# Altium PCB VSC_PCB.PcbDoc (part 2 of 2)
Units mil, origin at the board's own origin, x right, y up, seen from the top; angles counter-clockwise.
Board outline 9964.56 x 7010.83 mil, 4 copper layers (Top Layer, Regulator Voltage, Regulator GND, Bottom Layer), stack 23.756 mil thick; 128 components, 80 nets, 378 pads, 666 vias.
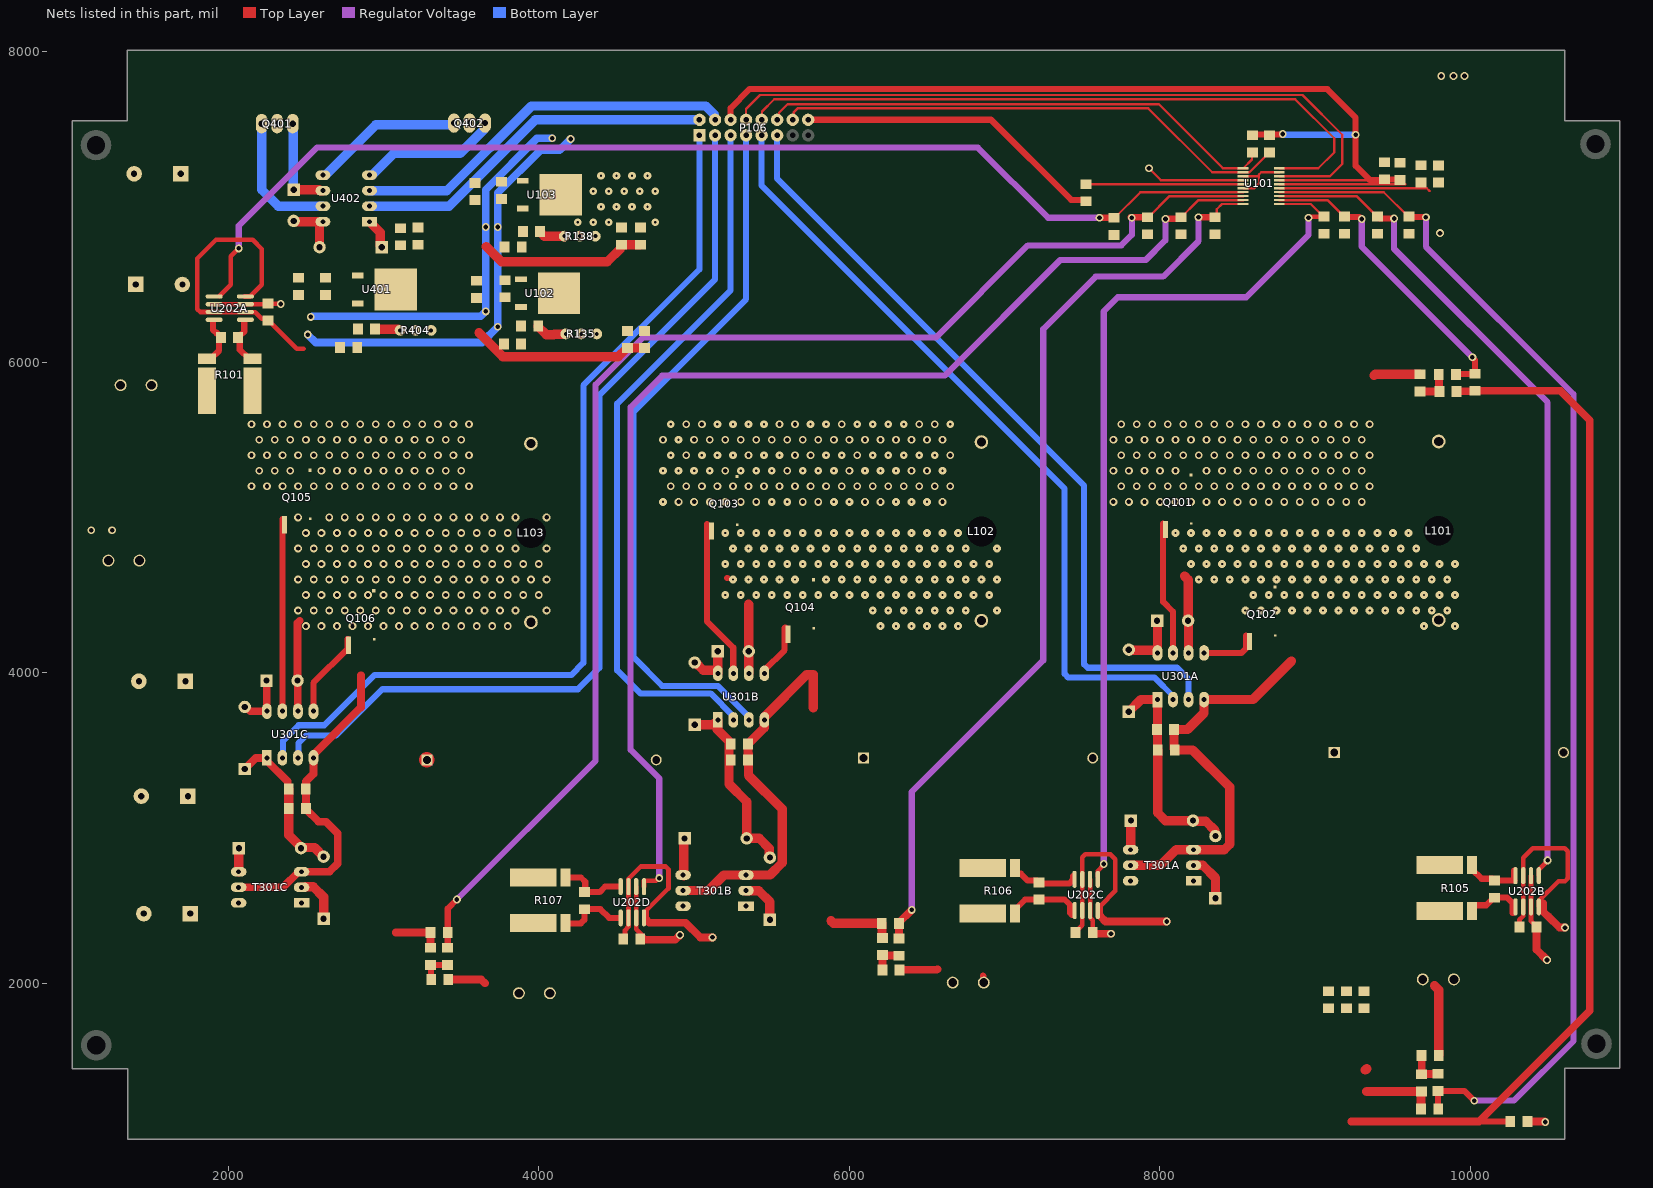
[diagram p4: the nets of this part, all layers, seen from the top]

## Via types
v1: diameter 50, hole 28, Top Layer to Bottom Layer, 361 vias
v2: diameter 50, hole 15, Top Layer to Bottom Layer, 264 vias
v3: diameter 50, hole 30, Top Layer to Bottom Layer, 41 vias

## Nets (pads, with @x,y where several pads share a name; then routed paths per layer and width w, separated by ;. In a path a pad name is that pad's centre, name@x,y a point inside that pad or via, vN(x,y) a via of type N, cw(c..) or ccw(c..) an arc to the next point about the centre after c; other vN are vias at no path point)
+3V3: C118.2 C119.2 P106.6 R131.2 R132.2 U101.16 U101.17 | length 6931.4
  Top Layer w15: U101.16@8767.72,7145.67 C119.2@9578.74,7145.67 ; U101.17@8767.72,7171.26 9350.39,7171.26
  Top Layer w40: P106.6@5234.65,7560.63 5234.65,7636.22 5356.4,7757.97 9076.67,7757.97 9259.84,7574.8 v3(9259.84,7464.57) 9259.84,7263.78 9350.39,7173.23 9444.88,7173.23 C118.2@9446.85,7175.2 ; R131.2@8594.49,7460.63 8600.45,7466.59 8789.43,7466.59 v3(8791.34,7468.5) ; C118.2@9444.88,7177.17 C118.2@9446.85,7175.2 ; C119.2@9547.24,7173.23 9545.28,7175.2 C118.2@9446.85,7175.2
  Bottom Layer w40: v3(8791.34,7468.5) 8795.28,7464.57 v3(9259.84,7464.57)
+10: C127.2 C128.2 C201A.2 C201B.2 C201C.2 C201D.2 R138.2 R138.W U103.2 U202A.3 U202A.6 U202B.3 U202B.6 U202C.3 U202C.6 U202D.3 U202D.6 | length 2106.5
  Top Layer w30: U202A.6@1901.57,6372.83 1902.17,6373.43 2243.5,6373.43 2246.06,6375.98 2336.61,6375.98 v3(2338.58,6374.02) ; U202D.6@4628.27,2623.43 U202D.6@4627.05,2622.2 U202D.3@4627.05,2421.42 4628.27,2420.2 4628.27,2348.11 4692.91,2283.46 4692.91,2279.53 ; v3@4905.51,2307.09 4909.45,2307.09 v3(4909.45,2311.02) ; U202C.6@7550,2669.29 U202C.3@7550,2468.5 7551.22,2467.28 7551.22,2421.1 7566.93,2405.39 C201C.2@7566.93,2326.77 ; U202B.6@10389.76,2692.91 U202B.3@10389.76,2492.13 10389.76,2400.21 10407.34,2382.64 10408.7,2382.64 10425.2,2366.14 C201B.2@10425.2,2362.2
  Top Layer w50: 4692.91,2279.53 4877.95,2279.53 v3(4909.45,2311.02) ; C201C.2@7566.93,2326.77 7566.93,2325.39 7573.43,2318.9 v3(7685.04,2318.9) ; C201B.2@10425.2,2362.2 10425.2,2216.54 v3(10492.13,2149.61)
  other v2: 4250,6900 4350,6900 4450,6900 4750,6900 4400,7000 4500,7000 4600,7000 4700,7000 4350,7100 4450,7100 4550,7100 4650,7100 4750,7100 4400,7200 4500,7200 4600,7200 4700,7200
+10D: C403.2 C404.2 D401.A R404.2 R404.W U401.2 U402.1 | length 206.4
  Top Layer w60: U402.1@2909.45,6903.94 2926.45,6903.94 2927.45,6902.94 2927.45,6885.94 2978.19,6835.2 2978.19,6750.16 D401.A@2988.19,6740.16
+12: C116.2 C117.2 C123.2 C124.2 R135.2 R135.W U101.15 U102.2 | length 975.8
  Top Layer w15: U101.15@8767.72,7120.08 9718.5,7120.08 9736.22,7102.36
+48: C101.1 C102.1 C103.1 C121.2 C122.2 C125.2 C126.2 C401.2 C402.2 C406.1 P101.1 P101.2 Q401.2 R101.1 U102.1 U103.1 U401.1
GND: C101.2 C102.2 C103.2 C104.1 C108.1 C109.1 C110.1 C116.1 C117.1 C118.1 C119.1 C120.1 C121.1 C122.1 C123.1 C124.1 C125.1 C126.1 C127.1 C128.1 C201A.1 C201B.1 C201C.1 C201D.1 C301A.1 C301B.1 C301C.1 C302A.1 C302B.1 C302C.1 C401.1 C402.1 C403.1 C404.1 C407.2 P102.1 P102.2 P106.16 Q102.2 Q104.2 Q106.2 Q402.3 R104.1 R109.2 R113.1 R116.1 R119.1 R123.1 R124.1 R125.1 R126.1 R127.1 R128.1 R129.1 R130.1 R133.1 R136.1 R139.2 R140.2 R141.2 R402.1 T301A.3 T301A.5 T301B.3 T301B.5 T301C.3 T301C.5 U101.3 U101.4 U101.6 U101.19 U202A.2 U202A.4 U202A.7 U202B.2 U202B.4 U202B.7 U202C.2 U202C.4 U202C.7 U202D.2 U202D.4 U202D.7 U301A.4 U301B.4 U301C.4 U402.4 | length 33367
  Top Layer w15: v3(7929.13,7248.03) 8005.91,7171.26 U101.4@8535.72,7171.26 ; U101.6@8535.72,7120.08 8608.27,7120.08 8637.8,7149.61 8637.8,7208.66 8638.78,7209.65 ; U101.3@8535.72,7196.85 8625.98,7196.85 8638.78,7209.65 ; U101.19@8767.72,7222.44 8651.57,7222.44 8638.78,7209.65
  Top Layer w30: U202A.2@2094.49,6322.83 1818.61,6322.83 1801.04,6340.41 1801.04,6667.18 1921.26,6787.4 2157.48,6787.4 2216.54,6728.35 2216.54,6498.11 2141.26,6422.83 U202A.4@2102.36,6422.83 ; U202A.2@2102.36,6322.83 2103.58,6321.61 2174.45,6321.61 2215.79,6280.28 2235.47,6280.28 C201A.1@2255.91,6267.72 2259.84,6267.72 2440.94,6086.61 2484.25,6086.61 ; C201D.1@4543.31,2283.46 4555.24,2295.4 4555.24,2342.1 4577.05,2363.91 U202D.2@4577.05,2421.42 U202D.7@4577.05,2622.2 4577.05,2671.54 4657.48,2751.97 4817.07,2751.97 4834.65,2734.39 4834.65,2610.24 4692.91,2468.5 4692.91,2409.45 ; C201C.1@7456.69,2326.77 7456.69,2330.71 7500,2374.02 U202C.2@7500,2468.5 U202C.7@7500,2669.29 7500,2811.02 7519.69,2830.71 7681.1,2830.71 7712.6,2799.21 7712.6,2594.49 7618.11,2500 7618.11,2429.13 ; C201B.1@10314.96,2362.2 10314.96,2409.45 10338.54,2433.03 10338.54,2490.91 U202B.2@10339.76,2492.13 U202B.7@10339.76,2692.91 10339.76,2808.27 10401.57,2870.08 10606.3,2870.08 10625.98,2850.39 10625.98,2675.05 10608.41,2657.48 10566.22,2657.48 10439.76,2531.02 U202B.4@10439.76,2492.13
  Top Layer w40: P106.16@5734.65,7560.63 6911.81,7560.63 7428.19,7044.25 7514.8,7044.25 C120.1@7523.62,7035.43 ; 9992.13,1110.24 R141.2@10255.91,1110.24
  Top Layer w50: T301C.5@2066.93,2618.11 2352.93,2618.11 2452.93,2718.11 T301C.3@2471.93,2718.11 2651.18,2718.11 2704.72,2771.65 2704.72,2964.57 2629.23,3040.06 2581.99,3040.06 2500,3122.05 C302C.1@2500,3125.98 2500,3299.21 2548.82,3348.03 U301C.4@2548.82,3451.97 2548.82,3470.97 2854.33,3776.48 2854.33,3984.25 ; 3078.74,2326.77 C110.1@3303.15,2326.77 R119.1@3303.15,2228.35 ; 4692.91,2409.45 4712.6,2389.76 4944.88,2389.76 5039.37,2295.28 v3(5118.11,2295.28) ; 7618.11,2429.13 7649.61,2397.64 v3(8043.31,2397.64) ; 9232.28,1110.24 9992.13,1110.24 10055.12,1110.24 10767.72,1822.83 10767.72,5625.98 10578.74,5814.96 10037.99,5814.96 10035.43,5817.52 10035.43,5818.9 10031.5,5814.96 C104.1@10027.56,5814.96 10025.59,5812.99 9911.42,5812.99 R104.1@9909.45,5811.02 ; 10468.5,2515.75 10468.5,2460.63 10500,2429.13 10502.4,2429.13 10573.27,2358.27 v3(10608.31,2358.27)
  Top Layer w60: 3614.17,6188.98 3767.72,6035.43 4511.81,6035.43 4565.43,6089.06 4569.37,6089.06 C124.1@4570.87,6090.55 C124.1@4570.87,6090.55 4680.78,6090.63 C123.1@4680.86,6090.7 ; 3661.42,6744.09 3759.84,6645.67 4440.94,6645.67 4526.06,6730.79 4526.06,6754.41 4527.56,6755.91 C128.1@4531.5,6755.91 C127.1@4653.54,6755.91 ; T301B.5@4929.13,2596.85 5092.91,2596.85 5192.91,2696.85 5488.99,2696.85 5568,2775.86 5568,2842.14 5566.93,2843.21 5566.93,3122.05 5350.39,3338.58 5350.39,3433.13 5350.39,3437.07 5350.39,3476.38 ; 5346.46,3476.38 C301B.1@5346.46,3539.36 5346.46,3543.29 5347.95,3544.79 5351.89,3544.79 5452.37,3645.27 5452.37,3695.68 U301B.4@5452.76,3696.06 5452.76,3715.06 5725.88,3988.19 5767.72,3988.19 5767.72,3774.12 ; 5881.89,2401.57 5897.64,2385.83 C109.1@6208.66,2385.83 6210.16,2384.33 6210.16,2292.83 6211.65,2291.34 R116.1@6212.6,2291.34 ; T301A.5@7811.02,2759.84 8003.94,2759.84 8103.94,2859.84 T301A.3@8235.56,2859.84 ; C302A.1@8095.67,3502.58 C302A.1@8095.67,3504.08 ; T301A.3@8216.02,2859.84 8413.67,2859.84 8448.82,2894.99 8448.82,3263.78 8210.02,3502.58 8097.17,3502.58 C302A.1@8095.67,3504.08 ; 8846.46,4074.8 8598.59,3826.94 U301A.4@8283.94,3826.94 8283.94,3740.64 8177.17,3633.86 C301A.1@8090.55,3633.86 8090.55,3511.64 8095.67,3506.52 C302A.1@8095.67,3504.08 ; 9322.83,1440.94 9330.71,1448.82 ; 9330.71,1303.15 R113.1@9682.6,1303.15 ; C108.1@9681.1,1188.98 R113.1@9681.1,1301.65
  Bottom Layer w50: v3(2511.81,6177.17) 2562.99,6125.98 3633.86,6125.98 v3(3736.22,6228.35) v3(3736.22,6870.08) 3736.22,7090.55 4011.81,7366.14 4133.86,7366.14 v3(4204.72,7437.01) ; v3@2540.7,6295.28 3625.98,6295.28 v3(3657.48,6326.77) v3(3657.48,6870.08) 3657.48,7110.24 3988.19,7440.94 v3(4086.61,7440.94)
  Bottom Layer w60: U402.4@2909.45,7203.94 2926.45,7203.94 3065.81,7343.29 3492.07,7343.29 3650.67,7501.9 3650.67,7536.5 Q402.3@3653.54,7539.37
  other v3: 1118.11,4917.32 1251.97,4917.32 2531.5,6291.34 9803.15,6830.71 9811.02,7842.52 9889.76,7842.52 9960.63,7842.52
HIN1: P106.9 U301A.2 | length 5056.9
  Bottom Layer w39.37: P106.9@5434.65,7460.63 5434.65,7136.22 7385.83,5185.04 7385.83,3991.78 7408.89,3968.72 7965.14,3968.72 8083.94,3849.92 U301A.2@8083.94,3826.94
HIN2: P106.5 U301B.2 | length 4642.3
  Bottom Layer w39.37: P106.5@5234.65,7460.63 5234.65,6462.99 4503.94,5732.28 4503.94,4015.75 4653.54,3866.14 5105.66,3866.14 5252.76,3719.04 U301B.2@5252.76,3696.06
HIN3: P106.1 U301C.2 | length 5960.6
  Bottom Layer w39.37: U301C.2@2348.82,3451.97 2353.15,3456.3 2353.15,3561.81 2452.76,3661.42 2618.11,3661.42 2940.94,3984.25 4208.66,3984.25 4287.4,4062.99 4287.4,5850.39 5034.65,6597.64 P106.1@5034.65,7460.63
HINP: P106.2 U402.2 | length 2350.4
  Bottom Layer w60: U402.2@2909.45,7003.94 3421.26,7003.94 3977.95,7560.63 P106.2@5029.23,7560.63
HN: C405.1 Q401.3 Q402.2 T301A.1 T301B.1 T301C.1 U402.6 | length 619.1
  Top Layer w60: C405.1@2421.26,7109.45 2586.4,7109.45 2591.91,7103.94 U402.6@2609.45,7103.94
  Bottom Layer w60: Q401.3@2414.96,7535.43 2417.83,7532.56 2417.83,7112.88 C405.1@2421.26,7109.45
HO: Q401.1 U402.7 | length 862.8
  Bottom Layer w60: Q401.1@2214.96,7535.43 2216.54,7533.86 2216.54,7110.24 2322.83,7003.94 U402.7@2609.45,7003.94
HS+1: Q101.1 U301A.7 | length 860.3
  Top Layer w39.37: 8019.69,4960.63 8019.69,4456.69 8083.94,4392.44 U301A.7@8083.94,4126.94
HS+2: Q103.1 U301B.7 | length 1031.5
  Top Layer w39.37: 5082.68,4956.69 5082.68,4330.71 5251.97,4161.42 5251.97,3996.06 U301B.7@5252.76,3996.06
HS+3: Q105.1 U301C.7 | length 1237.8
  Top Layer w40: U301C.7@2348.82,3751.97 Q105.1@2348.82,4989.76
HS-1: C303A.2 L101.1 Q101.2 Q102.3 U301A.6 | length 506.1
  Top Layer w60: 8157.48,4622.05 8181.1,4598.43 C303A.2@8181.1,4334.65 8183.56,4332.19 8183.56,4127.32 U301A.6@8183.94,4126.94
  other v2: 9700,4300 9900,4300 8550,4400 8650,4400 8750,4400 8850,4400 8950,4400 9050,4400 9150,4400 9250,4400 9350,4400 9450,4400 9550,4400 9650,4400 9750,4400 9850,4400 8600,4500 8700,4500 8800,4500 8900,4500 9000,4500 9100,4500 9200,4500 9300,4500 9400,4500 9500,4500 9600,4500 9700,4500 9800,4500 9900,4500 8250,4600 8350,4600 8450,4600 8550,4600 8650,4600 8750,4600 8850,4600 8950,4600 9050,4600 9150,4600 9250,4600 9350,4600 9450,4600 9550,4600 9650,4600 9750,4600 9850,4600 8200,4700 8300,4700 8400,4700 8500,4700 8600,4700 8700,4700 8800,4700 8900,4700 9000,4700 9100,4700 9200,4700 9300,4700 9400,4700 9500,4700 9600,4700 9700,4700 9800,4700 9900,4700 8150,4800 8250,4800 8350,4800 8450,4800 8550,4800 8650,4800 8750,4800 8850,4800 8950,4800 9050,4800 9150,4800 9250,4800 9350,4800 9450,4800 9550,4800 9650,4800 8100,4900 8200,4900 8300,4900 8400,4900 8500,4900 8600,4900 8700,4900 8800,4900 8900,4900 9000,4900 9100,4900 9200,4900 9300,4900 9400,4900 9500,4900 9600,4900
HS-2: C303B.2 L102.1 Q103.2 Q104.3 U301B.6 | length 447.5
  Top Layer w39.37: 5212.99,4609.06 5214.17,4610.24
  Top Layer w60: 5350.39,4440.94 5351.97,4439.37 C303B.2@5351.97,4137.8 5352.37,4137.39 5352.37,3996.45 U301B.6@5352.76,3996.06
  other v2: 6200,4300 6300,4300 6400,4300 6500,4300 6600,4300 6700,4300 6150,4400 6250,4400 6350,4400 6450,4400 6550,4400 6650,4400 6750,4400 6950,4400 5200,4500 5300,4500 5400,4500 5500,4500 5600,4500 5700,4500 5800,4500 5900,4500 6000,4500 6100,4500 6200,4500 6300,4500 6400,4500 6500,4500 6600,4500 6700,4500 6800,4500 6900,4500 5250,4600 5350,4600 5450,4600 5550,4600 5650,4600 5850,4600 5950,4600 6050,4600 6150,4600 6250,4600 6350,4600 6450,4600 6550,4600 6650,4600 6750,4600 6850,4600 6950,4600 5200,4700 5300,4700 5400,4700 5500,4700 5600,4700 5700,4700 5800,4700 5900,4700 6000,4700 6100,4700 6200,4700 6300,4700 6400,4700 6500,4700 6600,4700 6700,4700 6800,4700 6900,4700 5250,4800 5350,4800 5450,4800 5550,4800 5650,4800 5750,4800 5850,4800 5950,4800 6050,4800 6150,4800 6250,4800 6350,4800 6450,4800 6550,4800 6650,4800 6750,4800 6950,4800 5200,4900 5300,4900 5400,4900 5500,4900 5600,4900 5700,4900 5800,4900 5900,4900 6000,4900 6100,4900 6200,4900 6300,4900 6400,4900 6500,4900 6600,4900 6700,4900
HS-3: C303C.2 L103.1 Q105.2 Q106.3 U301C.6 | length 589.5
  Top Layer w50: U301C.6@2448.82,3751.97 2447.64,3753.15 2447.64,3947.64 C303C.2@2446.46,3948.82 2446.46,4320.47 2460.63,4334.65
  other v1: 2500,4300 2600,4300 2700,4300 2800,4300 2900,4300 3000,4300 3100,4300 3200,4300 3300,4300 3400,4300 3500,4300 3600,4300 3700,4300 3800,4300 2450,4400 2550,4400 2650,4400 2750,4400 2850,4400 2950,4400 3050,4400 3150,4400 3250,4400 3350,4400 3450,4400 3550,4400 3650,4400 3750,4400 3850,4400 4050,4400 2500,4500 2600,4500 2700,4500 2800,4500 2900,4500 3000,4500 3100,4500 3200,4500 3300,4500 3400,4500 3500,4500 3600,4500 3700,4500 3800,4500 3900,4500 4000,4500 2450,4600 2550,4600 2650,4600 2750,4600 2850,4600 2950,4600 3050,4600 3150,4600 3250,4600 3350,4600 3450,4600 3550,4600 3650,4600 3750,4600 3850,4600 3950,4600 4050,4600 2500,4700 2600,4700 2700,4700 2800,4700 2900,4700 3000,4700 3100,4700 3200,4700 3300,4700 3400,4700 3500,4700 3600,4700 3700,4700 3800,4700 3900,4700 4000,4700 2450,4800 2550,4800 2650,4800 2750,4800 2850,4800 2950,4800 3050,4800 3150,4800 3250,4800 3350,4800 3450,4800 3550,4800 3650,4800 3750,4800 3850,4800 4050,4800 2500,4900 2600,4900 2700,4900 2800,4900 2900,4900 3000,4900 3100,4900 3200,4900 3300,4900 3400,4900 3500,4900 3600,4900 3700,4900 3800,4900 2450,5000 2650,5000 2750,5000 2850,5000 2950,5000 3050,5000 3150,5000 3250,5000 3350,5000 3450,5000 3550,5000 3650,5000 3750,5000 3850,5000 4050,5000
IS+1: C111.2 R101.2 U202A.8 | length 316.9
  Top Layer w40: R101.2@1863.48,6021.96 1888.48,6021.96 1941.26,6074.74 1941.26,6145.98 C111.2@1952.76,6157.48 1952.76,6161.42 1928.94,6185.23 1925.01,6185.23 1901.57,6208.66 U202A.8@1901.57,6263.78
IS+2: C112.2 R105.2 U202B.8 | length 372.2
  Top Layer w39.37: R105.2@10009.09,2760.06 10009.09,2735.06 10070.92,2673.23 10141.73,2673.23 C112.2@10153.54,2661.42 U202B.8@10283.86,2661.42 ; U202B.8@10279.53,2684.48 U202B.8@10279.53,2726.39
IS+3: C113.2 R106.2 U202C.8 | length 463.6
  Top Layer w39.37: R106.2@7066.51,2743.78 7066.51,2718.78 7079.83,2705.46 7104.83,2705.46 7148.87,2661.42 7208.66,2661.42 7227.78,2642.3 7416.65,2642.3 7439.72,2665.37 U202C.8@7439.72,2689.55
IS+4: C114.2 R107.2 U202D.8 | length 447.1
  Top Layer w39.37: R107.2@4171.57,2681.1 4271.65,2681.1 4299.21,2653.54 4299.21,2592.61 C114.2@4293.82,2587.21 4391.06,2587.21 4426.05,2622.2 U202D.8@4518.82,2622.2
IS-1: C111.1 R101.3 U202A.1 | length 314.2
  Top Layer w40: U202A.1@2102.36,6263.78 2102.36,6196.85 2078.43,6172.91 2074.49,6172.91 2062.99,6161.42 C111.1@2062.99,6157.48 2074.49,6145.98 2074.49,6079.95 2130.82,6023.62 2133.86,6023.62 2135.52,6021.96 R101.3@2157.48,6021.96
IS-2: C112.1 R105.3 U202B.1 | length 423.7
  Top Layer w39.37: R105.3@10009.09,2466.06 10009.09,2451.54 10011.81,2448.82 10011.81,2492.13 10022.4,2502.72 10101.14,2502.72 10149.61,2551.18 C112.1@10153.54,2551.18 10236.22,2551.18 10271.65,2515.75 10271.65,2452.76
IS-3: C113.1 R106.3 U202C.1 | length 489.1
  Top Layer w39.37: R106.3@7066.51,2449.78 7066.51,2474.78 7131.1,2539.37 C113.1@7220.47,2539.37 7385.83,2539.37 7421.26,2503.94 7421.26,2452.76 7433.07,2440.94
IS-4: C114.1 R107.3 U202D.1 | length 454.2
  Top Layer w39.37: R107.3@4167.63,2385.83 4270.76,2385.83 4293.82,2408.89 C114.1@4293.82,2476.98 4397.04,2476.98 4452.6,2421.42 U202D.1@4521.14,2421.42
ISO1: R130.2 U101.7 U202A.5 | length 7439.1
  Top Layer w15: R130.2@7704.72,6929.13 7708.66,6929.13 7874.02,7094.49 U101.7@8535.72,7094.49
  Top Layer w30: U202A.5@1941.69,6424.06 2015.86,6498.22 2015.86,6681.21 v3(2066.93,6732.28)
  Top Layer w40: v3(7610.24,6929.13) R130.2@7704.72,6929.13
  Regulator Voltage w40: v3(2066.93,6732.28) 2066.93,6877.54 2571.27,7381.89 6826.77,7381.89 7279.53,6929.13 v3(7610.24,6929.13)
ISO2: R127.2 U101.13 U202B.5 | length 5464.6
  Top Layer w15: U101.13@8767.72,7068.9 9265.75,7068.9 9397.64,6937.01 R127.2@9401.57,6937.01
  Top Layer w30: U202B.5@10439.76,2692.91 10439.76,2731.81 10496.06,2788.11 v3(10496.06,2791.34)
  Top Layer w40: R127.2@9401.57,6937.01 9413.07,6925.51 9440,6925.51 9440.32,6925.2 v3(9507.87,6925.2)
  Regulator Voltage w40: v3(9507.87,6925.2) 9507.87,6728.35 10496.06,5740.16 v3(10496.06,2791.34)
ISO3: R123.2 U101.11 U202C.5 | length 5713.5
  Top Layer w15: U101.11@8767.72,7017.72 8970.47,7017.72 9051.18,6937.01 R123.2@9055.12,6937.01
  Top Layer w30: U202C.5@7598.43,2685.04 7598.43,2722.93 7637.8,2762.3 v3(7637.8,2767.72) ; v3(8956.69,6929.13) 8962.1,6929.13 8969.98,6937.01 R123.2@9055.12,6937.01
  Regulator Voltage w40: v3(7637.8,2767.72) 7637.8,6326.77 7728.35,6417.32 8555.12,6417.32 8956.69,6818.9 v3(8956.69,6929.13)
ISO4: R126.2 U101.9 U202D.5 | length 7830.9
  Top Layer w15: R126.2@8123.96,6923.17 8127.9,6923.17 8248.03,7043.31 U101.9@8535.72,7043.31
  Top Layer w30: U202D.5@4677.05,2622.2 4677.05,2661.1 4754.12,2661.1 4770.18,2677.17 v3(4775.59,2677.17)
  Top Layer w40: v3(8035.43,6921.26) 8037.35,6923.17 R126.2@8123.96,6923.17
  Regulator Voltage w40: v3(4775.59,2677.17) 4775.59,3318.9 4590.55,3503.94 4590.55,5708.66 4795.28,5913.39 6614.17,5913.39 7358.27,6657.48 7909.45,6657.48 8035.43,6783.46 v3(8035.43,6921.26)
LIN1: P106.11 U301A.3 | length 5068.1
  Bottom Layer w39.37: P106.11@5534.65,7460.63 5534.65,7181.89 7511.81,5204.72 7511.81,4054.56 7534.87,4031.5 8110.24,4031.5 8183.94,3957.79 U301A.3@8183.94,3826.94
LIN2: P106.7 U301B.3 | length 4582.6
  Bottom Layer w39.37: P106.7@5334.65,7460.63 5334.65,6405.51 4610.24,5681.1 4610.24,4098.43 4793.15,3915.51 5152.31,3915.51 5352.76,3715.06 U301B.3@5352.76,3696.06
LIN3: P106.3 U301C.3 | length 5972.2
  Bottom Layer w39.37: U301C.3@2448.82,3451.97 2453.15,3456.3 2453.15,3547.64 2500,3594.49 2692.91,3594.49 2992.13,3893.7 4251.97,3893.7 4389.76,4031.5 4389.76,5787.4 5134.65,6532.28 P106.3@5134.65,7460.63
LINP: P106.4 U402.3 | length 2505.1
  Bottom Layer w60: U402.3@2909.45,7103.94 3407.09,7103.94 3952.76,7649.61 5074.8,7649.61 5130.82,7593.59 5130.82,7564.46 P106.4@5134.65,7560.63
LO: Q402.1 U402.5 | length 985.9
  Bottom Layer w60: U402.5@2609.45,7203.94 2626.45,7203.94 2950.07,7527.56 3446.61,7527.56 3453.54,7534.49 Q402.1@3453.54,7539.37
LS+1: Q102.1 U301A.5 | length 382.6
  Top Layer w39.37: U301A.5@8279.53,4137.8 8291.34,4125.98 8523.62,4125.98 8555.12,4157.48 8555.12,4240.16 ; U301A.5@8283.94,4126.94 U301A.5@8283.94,4133.38
LS+2: Q104.1 U301B.5 | length 350.7
  Top Layer w39.37: U301B.5@5452.76,3996.06 5452.76,4015.06 5582.68,4144.98 5582.68,4287.4 5586.61,4291.34
LS+3: Q106.1 U301C.5 | length 556.1
  Top Layer w39.37: U301C.5@2548.82,3751.97 2548.82,3934.65 2769.69,4155.51 Q106.1@2769.69,4216.54
NetC105_1: C105.1 C106.1 C107.1 R109.1 R139.1 R140.1 | length 0.2
  Top Layer w100: C107.1@3279.53,3438.35 C107.1@3279.68,3438.5
NetC105_2: C105.2 L101.2 R105.1
NetC106_2: C106.2 L102.2 R106.1
NetC107_2: C107.2 L103.2 R107.1
NetC120_2: C120.2 U101.5 | length 1012.1
  Top Layer w15: C120.2@7523.62,7145.67 U101.5@8535.72,7145.67
NetC301A_2: C301A.2 C302A.2 D301A.A D302A.K D303A.K U301A.1 | length 1362
  Top Layer w60: D301A.A@7799.21,3748.03 7878.12,3826.94 U301A.1@7983.94,3826.94 C301A.2@7983.94,3634.49 ; C301A.2@7981.81,3634.49 7981.81,3628.43 7983.94,3626.29 7983.94,3578.74 C302A.2@7983.94,3504.07 ; C302A.2@7985.44,3502.58 7985.44,3097.24 8035.43,3047.24 D302A.K@8212.6,3047.24 8216.43,3043.42 8294.58,3043.42 D303A.K@8354,2984
NetC301B_2: C301B.2 C302B.2 D301B.A D302B.K D303B.K U301B.1 | length 1227.9
  Top Layer w60: D301B.A@5003.94,3665.35 5122.05,3665.35 5132.76,3676.06 U301B.1@5151.76,3676.06 ; U301B.1@5152.76,3696.06 5151.76,3695.06 U301B.1@5151.76,3676.06 ; D303B.K@5488,2809 5484.17,2812.83 5484.17,2867.83 5418.93,2933.07 D302B.K@5338.58,2933.07 5338.58,3169.29 5224.41,3283.46 5224.41,3559.06 5149.61,3633.86 5151.76,3636.01 U301B.1@5151.76,3676.06
NetC301C_2: C301C.2 C302C.2 D301C.A D302C.K D303C.K U301C.1 | length 1016
  Top Layer w50: D301C.A@2106.3,3379.53 2177.57,3450.8 2247.65,3450.8 U301C.1@2248.82,3451.97 2248.82,3432.97 2382.63,3299.16 2382.63,3258.46 C301C.2@2389.13,3251.97
  Top Layer w60: C301C.2@2389.13,3251.97 2389.13,3047.88 2389.76,3047.24 2389.76,2954.23 2470.09,2873.91 D302C.K@2472.33,2873.91 ; D302C.K@2468.5,2870.08 D302C.K@2472.33,2873.91 ; D303C.K@2614,2815 2555.09,2873.91 D302C.K@2472.33,2873.91
NetC303A_1: C303A.1 D301A.K U301A.8 | length 411.9
  Top Layer w39.37: D301A.K@7799.21,4148.03 D301A.K@7800.79,4148.03
  Top Layer w60: D301A.K@7800.79,4148.03 7804.61,4144.2 7983.02,4144.2 7983.94,4143.28 U301A.8@7983.94,4126.94 7983.56,4127.32 7983.56,4332.19 C303A.1@7981.1,4334.65
NetC303B_1: C303B.1 D301B.K U301B.8 | length 330.4
  Top Layer w60: D301B.K@5003.94,4065.35 5009.35,4065.35 5059.26,4015.45 5151.83,4015.45 5152.76,4014.52 U301B.8@5152.76,3996.06 5152.37,3996.45 5152.37,4137.39 C303B.1@5151.97,4137.8
NetC303C_1: C303C.1 D301C.K U301C.8 | length 351.8
  Top Layer w50: D301C.K@2106.3,3779.53 2114.42,3779.53 2141.98,3751.97 U301C.8@2248.82,3751.97 2247.64,3753.15 2247.64,3947.64 C303C.1@2246.46,3948.82
NetC405_2: C405.2 D401.K U402.8 | length 372.7
  Top Layer w60: C405.2@2421.26,6909.45 2426.67,6909.45 2432.18,6903.94 U402.8@2609.45,6903.94 2592.99,6903.94 2588.19,6899.14 D401.K@2588.19,6740.16
NetC406_2: C406.2 C407.1 T301A.6 T301B.6 T301C.6
NetD302A_A: D302A.A T301A.4 | length 188.1
  Top Layer w60: T301A.4@7811.02,2859.84 7811.81,2860.63 7811.81,3046.46 D302A.A@7812.6,3047.24
NetD302B_A: D302B.A T301B.4 | length 248
  Top Layer w39.37: T301B.4@4929.13,2696.85 T301B.4@4933.07,2692.91
  Top Layer w60: T301B.4@4933.07,2692.91 4933.07,2927.56 D302B.A@4938.58,2933.07
NetD302C_A: D302C.A T301C.4 | length 152.6
  Top Layer w60: T301C.4@2066.93,2718.11 2067.72,2718.9 2067.72,2869.29 D302C.A@2068.5,2870.08
NetD303A_A: D303A.A T301A.2 | length 315.1
  Top Layer w60: T301A.2@8216.02,2759.84 8216.41,2759.46 8275.97,2759.46 8357,2678.43 D303A.A@8357,2538
NetD303B_A: D303B.A T301B.2 | length 299.9
  Top Layer w60: T301B.2@5334.13,2596.85 5334.52,2596.47 5416.92,2596.47 5488,2525.39 D303B.A@5488,2409
NetD303C_A: D303C.A T301C.2 | length 311.6
  Top Layer w60: T301C.2@2471.93,2618.11 2491.47,2618.11 2495.41,2622.05 2547.24,2622.05 2614,2555.29 D303C.A@2614,2415
NetP103_1: P103.1 P103.2 R105.4 R112.2 | length 460.2
  Top Layer w60: 9767.72,1984.25 9795.28,1956.69 R112.2@9795.28,1535.43
NetP104_1: P104.1 P104.2 R106.4 R115.2 | length 248.6
  Top Layer w39.37: 6860.2,2049.24 6862.2,2047.24
  Top Layer w50: R115.2@6322.83,2086.61 6562.99,2086.61 6566.93,2090.55
NetP105_1: P105.1 P105.2 R107.4 R118.2 | length 246
  Top Layer w50: R118.2@3417.32,2023.62 3629.92,2023.62 3653.54,2000
NetQ101_3: Q101.3 Q103.3 Q105.3 R101.4 R102.2 | length 298.5
  Top Layer w60: 9377.95,5913.39 9385.83,5921.26 R102.2@9673.23,5921.26
  other v1: 4900,5100 5000,5100 5300,5100 5400,5100 5700,5100 5800,5100 6100,5100 6200,5100 6600,5100 7700,5100 7800,5100 7900,5100 8000,5100 8100,5100 8200,5100 8300,5100 8400,5100 8500,5100 8600,5100 8700,5100 8800,5100 8900,5100 9000,5100 9100,5100 9200,5100 9300,5100 2150,5200 2250,5200 2350,5200 2450,5200 2550,5200 2650,5200 2750,5200 2850,5200 2950,5200 3050,5200 3150,5200 3250,5200 3350,5200 3450,5200 3550,5200 4850,5200 4950,5200 5050,5200 5150,5200 5250,5200 5350,5200 5450,5200 5550,5200 5650,5200 5750,5200 5850,5200 5950,5200 6050,5200 6150,5200 6250,5200 6350,5200 6450,5200 6550,5200 6650,5200 7750,5200 7850,5200 7950,5200 8050,5200 8150,5200 8250,5200 8350,5200 8450,5200 8550,5200 8650,5200 8750,5200 8850,5200 8950,5200 9050,5200 9150,5200 9250,5200 9350,5200 2200,5300 2300,5300 2400,5300 2600,5300 2700,5300 2800,5300 2900,5300 3000,5300 3100,5300 3200,5300 3300,5300 3400,5300 3500,5300 5200,5300 5600,5300 6000,5300 6400,5300 6500,5300 7700,5300 7800,5300 7900,5300 8000,5300 8100,5300 8300,5300 8400,5300 8500,5300 8600,5300 8700,5300 8800,5300 8900,5300 9000,5300 9100,5300 9200,5300 9300,5300 2150,5400 2250,5400 2350,5400 2450,5400 2550,5400 2650,5400 2750,5400 2850,5400 2950,5400 3050,5400 3150,5400 3250,5400 3350,5400 3450,5400 3550,5400 4950,5400 5350,5400 5650,5400 5750,5400 6050,5400 6650,5400 7750,5400 7850,5400 7950,5400 8050,5400 8150,5400 8250,5400 8350,5400 8450,5400 8550,5400 8650,5400 8750,5400 8850,5400 8950,5400 9050,5400 9150,5400 9250,5400 9350,5400 2200,5500 2300,5500 2400,5500 2500,5500 2600,5500 2700,5500 2800,5500 2900,5500 3000,5500 3100,5500 3200,5500 3300,5500 3400,5500 3500,5500 4800,5500 5000,5500 5100,5500 5200,5500 5300,5500 5400,5500 5500,5500 5600,5500 5700,5500 5800,5500 5900,5500 6000,5500 6100,5500 6200,5500 6300,5500 6400,5500 6500,5500 6600,5500 7700,5500 7800,5500 7900,5500 8000,5500 8100,5500 8200,5500 8300,5500 8400,5500 8500,5500 8600,5500 8700,5500 8800,5500 8900,5500 9000,5500 9100,5500 9200,5500 9300,5500 2150,5600 2250,5600 2350,5600 2450,5600 2550,5600 2650,5600 2750,5600 2850,5600 2950,5600 3050,5600 3150,5600 3250,5600 3350,5600 3450,5600 3550,5600 4950,5600 5050,5600 5550,5600 5650,5600 5950,5600 6450,5600 6550,5600 7750,5600 7850,5600 7950,5600 8050,5600 8150,5600 8250,5600 8350,5600 8450,5600 8550,5600 8650,5600 8750,5600 8850,5600 8950,5600 9050,5600 9150,5600 9250,5600 9350,5600
  other v2: 4800,5100 5100,5100 5200,5100 5500,5100 5600,5100 5900,5100 6000,5100 6300,5100 6400,5100 6500,5100 4800,5300 4900,5300 5000,5300 5100,5300 5300,5300 5400,5300 5500,5300 5700,5300 5800,5300 5900,5300 6100,5300 6200,5300 6300,5300 6600,5300 4850,5400 5050,5400 5150,5400 5250,5400 5450,5400 5550,5400 5850,5400 5950,5400 6150,5400 6250,5400 6350,5400 6450,5400 6550,5400 4900,5500 4850,5600 5150,5600 5250,5600 5350,5600 5450,5600 5750,5600 5850,5600 6050,5600 6150,5600 6250,5600 6350,5600 6650,5600
NetR102_1: R102.1 R103.2 R104.2 | length 237.9
  Top Layer w50: R102.1@9673.23,5811.02 R104.2@9799.21,5811.02 9797.24,5812.99 9797.24,5919.29 R103.2@9795.28,5921.26
NetR112_1: R112.1 R113.2 R114.2 | length 230
  Top Layer w50: R112.1@9685.04,1535.43 R113.2@9685.04,1413.39 9687.01,1415.35 9789.37,1415.35 R114.2@9791.34,1417.32
NetR115_1: R115.1 R116.2 R117.2 | length 202.4
  Top Layer w50: R115.1@6212.6,2086.61 R116.2@6212.6,2181.1 6214.57,2179.13 6316.93,2179.13 R117.2@6318.9,2177.17
NetR118_1: R118.1 R119.2 R120.2 | length 206.4
  Top Layer w39.37: R118.1@3307.09,2023.62 3305.12,2025.59 3305.12,2116.14 R119.2@3303.15,2118.11 R120.2@3413.39,2118.11
NetR133_2: R133.2 R134.2 U102.3
NetR134_1: R134.1 R135.1 | length 203.9
  Top Layer w60: R134.1@3996.06,6232.28 3996.06,6228.35 4047.24,6177.17 4096.95,6177.17 4098.97,6179.19 4171.31,6179.19 R135.1@4173.23,6181.1
NetR136_2: R136.2 R137.2 U103.3
NetR137_1: R137.1 R138.1 | length 176.8
  Top Layer w60: R137.1@4007.87,6842.52 4007.87,6838.58 4035.43,6811.02 4161.42,6811.02 R138.1@4165.35,6807.09 ; R138.1@4163.78,6808.66 R138.1@4163.78,6811.02
NetR402_2: R402.2 R403.2 U401.3
NetR403_1: R403.1 R404.1 | length 164.7
  Top Layer w60: R403.1@2944.88,6212.6 3095.72,6212.6 3103.59,6204.72 R404.1@3106.3,6204.72
Shield: R141.1 | length 115.8
  Top Layer w50: R141.1@10366.14,1110.24 10476.38,1110.24 v3(10480.32,1106.3)
SPI2(ADC)-MISO: P106.8 U101.18 | length 4678.5
  Top Layer w15: P106.8@5334.65,7560.63 5334.65,7629.92 5425.2,7720.47 8917.32,7720.47 9173.23,7464.57 9173.23,7275.59 9094.49,7196.85 U101.18@8767.72,7196.85
SPI2(ADC)-MOSI: P106.14 R132.1 U101.2 | length 3351.1
  Top Layer w15: P106.14@5634.65,7560.63 5642.58,7568.56 5642.58,7611.08 5665.35,7633.86 7924.61,7633.86 8336.03,7222.44 8576.87,7222.44 8676.79,7322.36 8676.79,7326.4 8700.79,7350.39 R132.1@8704.72,7350.39
SPI2(ADC)-NCS: P106.12 R131.1 U101.1@8535.72,7248.03 | length 3387.1
  Top Layer w15: P106.12@5534.65,7560.63 5547.08,7573.07 5547.08,7606.14 5602.36,7661.42 7991.54,7661.42 8404.93,7248.03 U101.1@8535.72,7248.03 ; U101.1@8562.72,7248.03 U101.1@8535.72,7248.03 ; R131.1@8594.49,7350.39 8592.87,7348.77 8592.87,7305.18 U101.1@8535.72,7248.03
SPI2(ADC)-SCK: P106.10 U101.20 | length 4363.8
  Top Layer w15: P106.10@5434.65,7560.63 5437.18,7563.16 5437.18,7614.34 5515.75,7692.91 8870.08,7692.91 9122.05,7440.94 9122.05,7350.39 9019.68,7248.03 U101.20@8767.72,7248.03
VS+1: C104.2 R103.1 R124.2 U101.12 | length 2003.5
  Top Layer w15: U101.12@8767.72,7043.31 9078.74,7043.31 9187.92,6934.13 R124.2@9191.85,6934.13
  Top Layer w39.37: R124.2@9191.85,6934.13 9283.46,6934.13 9296.34,6921.26 v3(9299.21,6921.26) ; R103.1@9905.51,5921.26 9907.48,5923.23 10025.59,5923.23 C104.2@10027.56,5925.2 10027.56,6012.87 10011.81,6028.62 v3(10011.81,6031.5)
  Regulator Voltage w39.37: v3(9299.21,6921.26) 9299.21,6744.09 v3(10011.81,6031.5)
VS+2: C108.2 R114.1 R128.2 U101.14 | length 7885.6
  Top Layer w15: U101.14@8767.72,7094.49 9440.94,7094.49 9598.43,6937.01 R128.2@9602.36,6937.01
  Top Layer w39.37: R128.2@9602.36,6937.01 9604.33,6935.04 9710.63,6935.04 v3(9712.6,6933.07) ; C108.2@9791.34,1188.98 R114.1@9791.34,1307.09 9960.63,1307.09 v3(10023.62,1244.09)
  Regulator Voltage w39.37: v3(9712.6,6933.07) 9712.6,6744.09 10663,5793.69 10663,1627.57 10279.53,1244.09 v3(10023.62,1244.09)
VS+3: C109.2 R117.1 R125.2 U101.10 | length 6038.7
  Top Layer w15: R125.2@8354.33,6933.07 8366.14,6944.88 8366.14,6984.25 8399.61,7017.72 U101.10@8535.72,7017.72
  Top Layer w40: v3(8248.03,6933.07) R125.2@8354.33,6933.07
  Top Layer w50: R117.1@6318.9,2287.4 C109.2@6318.9,2385.83 6318.9,2389.76 v3@6397.64,2468.5
  Regulator Voltage w40: v3(6401.57,2472.44) 6401.57,3232.28 7248.03,4078.74 7248.03,6212.6 7586.61,6551.18 8019.69,6551.18 8248.03,6779.53 v3(8248.03,6933.07)
VS+4: C110.2 R120.1 R129.2 U101.8 | length 8773.6
  Top Layer w15: R129.2@7921.26,6933.07 7925.2,6933.07 8061.02,7068.9 U101.8@8535.72,7068.9
  Top Layer w39.37: R120.1@3413.39,2228.35 C110.2@3413.39,2326.77 3413.39,2480.32 v3(3472.44,2539.37) ; v3(7818.9,6929.13) 7814.96,6929.13 7811.02,6933.07 R129.2@7921.26,6933.07
  Regulator Voltage w39.37: v3(3472.44,2539.37) 4366.14,3433.07 4366.14,5854.33 4669.29,6157.48 6555.12,6157.48 7149.61,6751.97 7751.97,6751.97 7818.9,6818.9 v3(7818.9,6929.13)
pads on no net: L101.3 L102.3 L103.3 P106.13 P106.15 U101.1@8510.72,7282.87

## Polygon pours and split planes (outlines as drawn)
HS-1 on Top Layer "HS-1_L01_P104" (solid, pour order 104): 8066.93,5011.81 8066.93,4515.75 8078.74,4515.75 8078.74,4507.87 8192.91,4507.87 8496.06,4507.87 8496.06,4322.83 9633.86,4322.83 9633.86,4224.41 9964.57,4224.41 9964.57,4704.72 9964.57,5011.81
HS-2 on Top Layer "HS-2_L01_P099" (solid, pour order 99): 5141.73,4374.02 5283.46,4374.02 6086.61,4374.02 6086.61,4169.29 6992.13,4169.29 6992.13,4208.66 6992.13,4236.22 6992.13,4456.69 6992.13,5003.94 5141.73,5003.94
HS-3 on Top Layer "HS-3_L01_P083" (solid, pour order 83): 2386.71,5066.93 2388.35,4263.78 4137.8,4263.78 4137.8,5066.93
GND on Top Layer "GND_L01_P084" (solid, pour order 84): 1586.61,4724.41 1586.61,2177.17 2797.87,2177.17 2797.87,3988.19 2800.55,4231.69 3121.43,4231.69 3121.43,1748.03 5629.92,1748.03 5629.92,4307.09 5958.4,4307.09 5946.18,1748.03 8602.41,1748.03 8602.41,4259.84 8952.76,4259.84 8952.76,1724.41 9028.97,1724.41 9028.97,1874.02 9381.89,1874.02 9381.89,1059.06 1460.63,1059.06 1460.63,1503.94 1271.65,1503.94 1271.65,1724.41 1062.99,1724.41 1062.99,4724.41
GND on Top Layer "NONET_L-01_P-001" (solid, pour order 117): 1065.93,4732.28 1341.46,4732.28 1341.46,5223.42 1219.41,5223.42 1219.41,7066.93 1426.39,7066.93 1426.39,7244.25 1859.59,7735.24 3621.83,7735.24 3621.83,7479.32 3695.79,7479.32 3870.61,7479.31 3870.61,7358.48 4543.84,7358.48 4543.84,7793.57 9949.35,7793.57 9949.35,7314.96 9401.57,7314.96 9401.57,7232.28 10133.86,7232.28 10133.86,7951.76 1471.38,7951.76 1471.38,7546.25 1065.93,7140.8 1065.93,6806.09
+48 on Top Layer "NONET_L-01_P-001" (solid, pour order 116): 1247.25,5275.59 1633.86,5275.59 1633.86,2307.09 1929.13,2307.09 1929.13,5960.63 1674.4,5960.63 1674.4,6122.05 1457.92,6122.05 1457.92,6824.13 2264.38,6824.13 2264.38,6511.81 2870.08,6511.81 2870.08,6582.08 2334.65,6582.08 2334.65,6894.39 1603.53,6894.39 1603.53,7240.16 1662.59,7318.9 3391.88,7318.9 3391.88,6488.19 3929.13,6488.19 3929.13,6582.08 3531.5,6582.08 3531.5,7122.05 3940.94,7122.05 3940.94,7196.85 3814.96,7196.85 3814.96,7460.63 2354.33,7460.63 2354.33,7599.35 2275.59,7599.35 2275.59,7460.63 1662.59,7460.63 1457.92,7240.16 1457.92,6952.76 1247.25,6952.76
GND on Top Layer "NONET_L-01_P-001" (solid, pour order 137): 9826.77,6866.14 8706.56,6866.14 8713.85,7204.72 8597.3,7204.72 8597.3,6866.14 7566.93,6866.14 7566.93,7082.68 7472.44,7082.68 7472.44,6771.65 9826.77,6771.65
GND on Top Layer "NONET_L-01_P-001" (solid, pour order 120): 2405.51,6464.57 2759.84,6464.57 2759.84,6055.12 2405.51,6055.12
GND on Top Layer "NONET_L-01_P-001" (solid, pour order 128): 3551.18,6452.76 3551.18,6059.06 3814.96,6059.06 3814.96,6452.76 3771.65,6452.76
NetC105_1 on Top Layer "NONET_L-01_P-001" (solid, pour order 132): 9381.89,1913.39 9381.89,3625.98 9007.87,3625.98 9007.87,1913.39
NetC105_2 on Top Layer "NETC105_2_L01_P112" (solid, pour order 112): 9661.42,5641.73 9661.42,5125.98 10066.93,5125.98 10066.93,3683.49 9618.11,3683.49 9618.11,2692.91 9951.41,2692.91 9945.6,3271.57 10530.06,3271.57 10694.94,3271.57 10694.94,3619.9 10500,3624.07 10500,5641.73
+12 on Top Layer "NONET_L-01_P-001" (solid, pour order 129): 10133.86,7188.98 9645.67,7188.98 9645.67,7098.43 9850.92,7098.43 9850.92,6271.65 4755.91,6271.65 4755.91,6598.43 3992.13,6598.43 3992.13,6299.21 4220.47,6299.21 4220.47,6102.36 4224.41,6106.3 4476.38,6106.3 4476.38,6149.61 10133.86,6149.61
NetR133_2 on Top Layer "NONET_L-01_P-001" (solid, pour order 127): 3933.07,6381.89 3933.07,6078.74 3834.65,6078.74 3834.65,6381.89
GND on Top Layer "NONET_L-01_P-001" (solid, pour order 126): 3551.18,7086.61 3551.18,6692.91 3814.96,6692.91 3814.96,7086.61 3771.65,7086.61
+10 on Top Layer "NONET_L-01_P-001" (solid, pour order 124): 4003.94,7299.21 4003.94,6917.32 4216.54,6917.32 4216.54,6751.97 4440.94,6751.97 4444.88,6755.91 4444.88,6811.02 4838.58,6811.02 4838.58,7299.21 4027.56,7299.21
NetR136_2 on Top Layer "NONET_L-01_P-001" (solid, pour order 123): 3940.94,7015.75 3940.94,6696.85 3842.52,6696.85 3842.52,7015.75
GND on Top Layer "NONET_L-01_P-001" (solid, pour order 122): 2854.33,7248.03 3279.53,7248.03 3279.53,6830.71 3066.93,6830.71 3066.93,7165.35 2854.33,7165.35
+10D on Top Layer "NONET_L-01_P-001" (solid, pour order 121): 2940.94,6787.4 2940.94,6322.83 3157.48,6322.83 3157.48,6157.48 3358.27,6157.48 3358.27,6787.4
NetR402_2 on Top Layer "NONET_L-01_P-001" (solid, pour order 119): 2874.02,6401.57 2874.02,6043.31 2791.34,6043.31 2791.34,6401.57
HN on Top Layer "NONET_L-01_P-001" (solid, pour order 118): 2377.95,7476.38 2377.95,7712.6 3594.49,7712.6 3594.49,7476.38 3515.75,7476.38 3515.75,7657.48 2452.76,7657.48 2452.76,7476.38
NetQ101_3 on Top Layer "NETQ101_3_L01_P082" (solid, pour order 82): 2098.43,5972.44 2098.43,5098.43 3618.11,5098.43 3618.11,5712.6 3614.17,5716.54 4732.28,5716.54 4732.28,5047.24 6716.54,5047.24 6716.54,5716.54 7657.48,5716.54 7657.48,5047.24 9448.82,5047.24 9448.82,5972.44 2448.82,5972.44
NetP103_1 on Top Layer "NETP103_1_L01_P110" (solid, pour order 110): 9964.57,2559.06 9964.57,2366.14 9964.57,1874.02 9602.36,1874.02 9602.36,2559.06
NetP104_1 on Top Layer "NETP104_1_L01_P108" (solid, pour order 108): 7031.5,2539.23 7031.5,2263.78 6956.69,2263.78 6956.69,1893.7 6523.62,1893.7 6523.62,2539.23
NetC106_2 on Top Layer "NETC106_2_L01_P107" (solid, pour order 107): 6783.46,5645.86 6783.46,5090.55 7035.43,5090.55 7035.43,3641.37 6649.61,3641.37 6649.61,2675.93 7010.36,2675.93 7016.69,3274.29 7423.31,3268.59 7586.61,3268.59 7586.61,3897.64 7586.61,5645.86
NetP105_1 on Top Layer "NETP105_1_L01_P089" (solid, pour order 89): 4125.98,2476.38 4125.98,2322.83 4267.72,2322.83 4267.72,1803.15 3614.17,1803.15 3610.24,1803.15 3610.24,2476.38
NetC107_2 on Top Layer "NETC107_2_L01_P088" (solid, pour order 88): 3688.98,5657.48 3688.98,5106.3 4188.98,5106.3 4188.98,4232.28 4188.98,3779.53 3700.79,3779.53 3700.79,2625.98 4114.79,2625.98 4114.79,3279.53 4822.83,3279.53 4822.83,3661.42 4692.91,3661.42 4692.91,5664.48
GND on Bottom Layer "GND_L04_P115" (solid, pour order 115): 10531.5,2400.3 10531.5,1729.09 8180.12,1729.09 8180.12,2452.76 7921.26,2452.76 7921.26,1729.09 5216.54,1729.09 5212.6,2400.3 4960.36,2400.3 4960.63,1729.09 2323.63,1729.09 2323.63,2055.12 1325.19,2055.12 1325.19,4619.28 1154,4616 1151.83,4808.43 1325.19,4808.43 1325.19,5008.37 1074.8,5007.55 1074.8,1729.09 1494.88,1729.09 1494.88,1226.36 2234.25,1226.36 10466.54,1226.36 10466.54,1531.5 10696.85,1531.5 10696.85,2400.3
HS-3 on Bottom Layer "HS-3_L04_P106" (solid, pour order 106): 2393.7,4263.78 2393.7,4877.95 2393.7,5059.06 4133.86,5059.06 4133.86,4263.78
HS-1 on Bottom Layer "HS-1_L04_P105" (solid, pour order 105): 8074.8,5001.98 8074.8,4519.69 8507.87,4519.69 8507.87,4334.65 9641.73,4334.65 9641.73,4326.77 9641.73,4318.9 9641.73,4232.28 9956.69,4232.28 9956.69,4692.91 9956.69,5001.98
HS-2 on Bottom Layer "HS-2_L04_P100" (solid, pour order 100): 5149.61,5003.94 5149.61,4381.89 6094.49,4381.89 6094.49,4177.17 6984.25,4177.17 6984.25,4448.82 6984.25,5003.94
NetC105_1 on Bottom Layer "NONET_L-01_P-001" (solid, pour order 130): 9291.34,3610.24 9287.4,3614.17 3173.23,3614.17 3173.23,3137.8 9299.21,3137.8
GND on Bottom Layer "NONET_L-01_P-001" (solid, pour order 136): 10023.62,7881.89 9767.72,7881.89 9767.72,6637.8 10019.69,6637.8 10031.5,6637.8
GND on Bottom Layer "NONET_L-01_P-001" (solid, pour order 135): 1349.17,4727.78 1349.17,5026 1775.59,5026 1775.59,7846.46 7972.44,7846.46 7972.44,7177.17 7795.53,7177.17 7795.53,7724.41 2122.05,7724.41 2031.5,7633.86 2031.5,4736.93
+10 on Bottom Layer "NONET_L-01_P-001" (solid, pour order 125): 4003.94,6917.32 4003.94,7299.21 4838.58,7299.21 4838.58,6811.02 4444.88,6811.02 4444.88,6751.97 4216.54,6751.97 4216.54,6917.32
NetQ101_3 on Bottom Layer "NETQ101_3_L04_P103" (solid, pour order 103): 7665.3,5696.85 7657.13,5051.18 9437.01,5051.18 9437.01,5696.85 7708.66,5696.85
NetQ101_3 on Bottom Layer "NETQ101_3_L04_P098" (solid, pour order 98): 6716.54,5728.35 6716.54,5047.24 4732.28,5047.24 4732.28,5728.35
NetQ101_3 on Bottom Layer "NETQ101_3_L04_P087" (solid, pour order 87): 3618.11,5740.16 3618.11,5106.3 2110.24,5106.3 2110.24,5740.16
no net on Bottom Solder "NONET_L06_P-001" (solid): 8078.74,4511.81 8078.74,4515.75 8062.99,4515.75 8062.99,5011.81 9952.76,5011.81 9952.76,4692.91 9952.76,4228.35 9633.86,4228.35 9633.86,4326.77 8500,4326.77 8500,4507.87 8488.19,4507.87 8196.85,4507.87
no net on Bottom Solder "NONET_L06_P-001" (solid): 5145.67,4374.02 5145.67,5003.94 6988.19,5003.94 6988.19,4452.76 6988.19,4173.23 6090.55,4173.23 6090.55,4374.02 5279.53,4374.02
no net on Bottom Solder "NONET_L06_P-001" (solid): 2389.76,4263.78 2389.76,5062.99 4137.8,5066.93 4137.8,4263.78
no net on Bottom Solder "NONET_L06_P-001" (solid): 7669.29,5708.66 7669.29,5059.06 9440.94,5059.06 9440.94,5708.66
no net on Bottom Solder "NONET_L06_P-001" (solid): 4736.22,5051.18 6698.43,5051.18 6704.72,5051.18 6704.72,5082.68 6704.72,5700.79 4736.22,5700.79
no net on Bottom Solder "NONET_L-01_P-001" (solid): 3610.24,5681.1 3618.11,5673.23 3618.11,5102.36 2094.49,5102.36 2094.49,5669.76
no net on Bottom Paste "NONET_L06_P-001" (solid): 8078.74,4511.81 8062.99,4511.81 8062.99,5007.87 9960.63,5007.87 9960.63,4700.79 9960.63,4228.35 9637.8,4228.35 9637.8,4326.77 8500,4326.77 8500,4511.81 8192.91,4511.81
no net on Bottom Paste "NONET_L06_P-001" (solid): 5143.7,4375.98 5143.7,4996.06 6994.09,4996.06 6994.09,4458.66 6994.09,4175.2 6088.58,4175.2 6088.58,4375.98 5285.43,4375.98
no net on Bottom Paste "NONET_L06_P-001" (solid): 2393.7,4263.78 2393.7,4889.76 2393.7,5066.93 4137.8,5066.93 4137.8,4263.78
no net on Bottom Paste "NONET_L06_P-001" (solid): 7669.29,5700.81 7669.29,5055.12 9437.01,5055.12 9437.01,5700.81
no net on Bottom Paste "NONET_L06_P-001" (solid): 4732.28,5700.79 4732.28,5051.18 6708.66,5051.18 6708.66,5700.79
NetQ101_3 on Bottom Paste "NONET_L-01_P-001" (solid): 3602.36,5708.66 2102.36,5712.6 2102.36,5637.8 2102.36,5098.43 3618.11,5098.43 3622.05,5102.36
+10 on Regulator Voltage "NONET_L-01_P-001" (solid, pour order 133): 3154.81,6681.1 3154.81,7314.96 4826.77,7314.96 4826.77,6295.28 2082.68,6295.28 2082.68,1772.4 4799.21,1767.62 4799.21,2366.14 4988.19,2366.14 4988.19,1767.83 7637.8,1767.72 7637.8,2416.88 7907.2,2417.93 7914.04,1772.49 10433.07,1772.4 10433.07,2211.3 10566.93,2211.3 10566.93,1610.24 10090.55,1610.24 10090.55,1370.08 1492.13,1370.08 1492.13,6681.1
HN on Regulator GND "NONET_L-01_P-001" (solid, pour order 140): 2135.54,7680 2135.81,7307 3614,7307 3614,5063.53 4185.99,5070.8 4185.99,4010 2753,4010 2753,2555.44 2413,2555.44 2413,2477 3181.95,2477 3181.95,3093 5584.53,3093 5584.53,2533.38 5275.54,2533.38 5275.54,2459.46 5909.08,2459.46 5909.08,3093 8443.18,3093 8443.18,2697.15 8155,2697.15 8155,2608 8669,2608 8669,3596 4753.02,3596 4753.02,5977.5 4059,5981.48 4059,7680
NetC406_2 on Regulator GND "NONET_L-01_P-001" (solid, pour order 139): 1456.69,7370.89 1456.69,7256.02 1051.06,7256.02 1055.12,1724.41 1456.69,1724.41 1456.69,1059.06 7585.53,1059.06 7585.53,2609.58 7878,2609.58 7878,2702 7345.96,2702 7345.96,1875 4808.18,1882.02 4805,2463 4987.53,2463 4987.53,2526 4677.44,2526 4677.44,1882.02 1955,1882.02 1955,2487 2123.89,2487 2123.89,2549 1955,2549 1955,7370.89

## Silkscreen, mask and mechanical layers (free items; w line width, h text height)
Top Overlay:
  lines w5.91: 997,1459 997,1474
  text "Voltage Source Converter" at 1751,1226 h50
Mechanical 1:
  lines w5.91: 996.06,1448.82 1354.33,1448.82 1354.33,996.06 10606.3,996.06 10606.3,1452.76 10960.63,1452.76 10960.63,7555.12 10606.3,7555.12 10606.3,8007.87 1350.39,8007.87 1350.39,7555.12 996.06,7555.12 996.06,1448.82

## Text inside footprints (layer, text, board x,y; h text height)
P106: Top Overlay "16" at 5794.65,7540.63 h50; Top Overlay "15" at 5794.65,7440.63 h50; Top Overlay "1" at 4934.65,7440.63 h50; Top Overlay "2" at 4934.65,7540.63 h50